# EAGLE board BMS Test Board rev1 (EAGLE 9.2.2), part 1 of 3
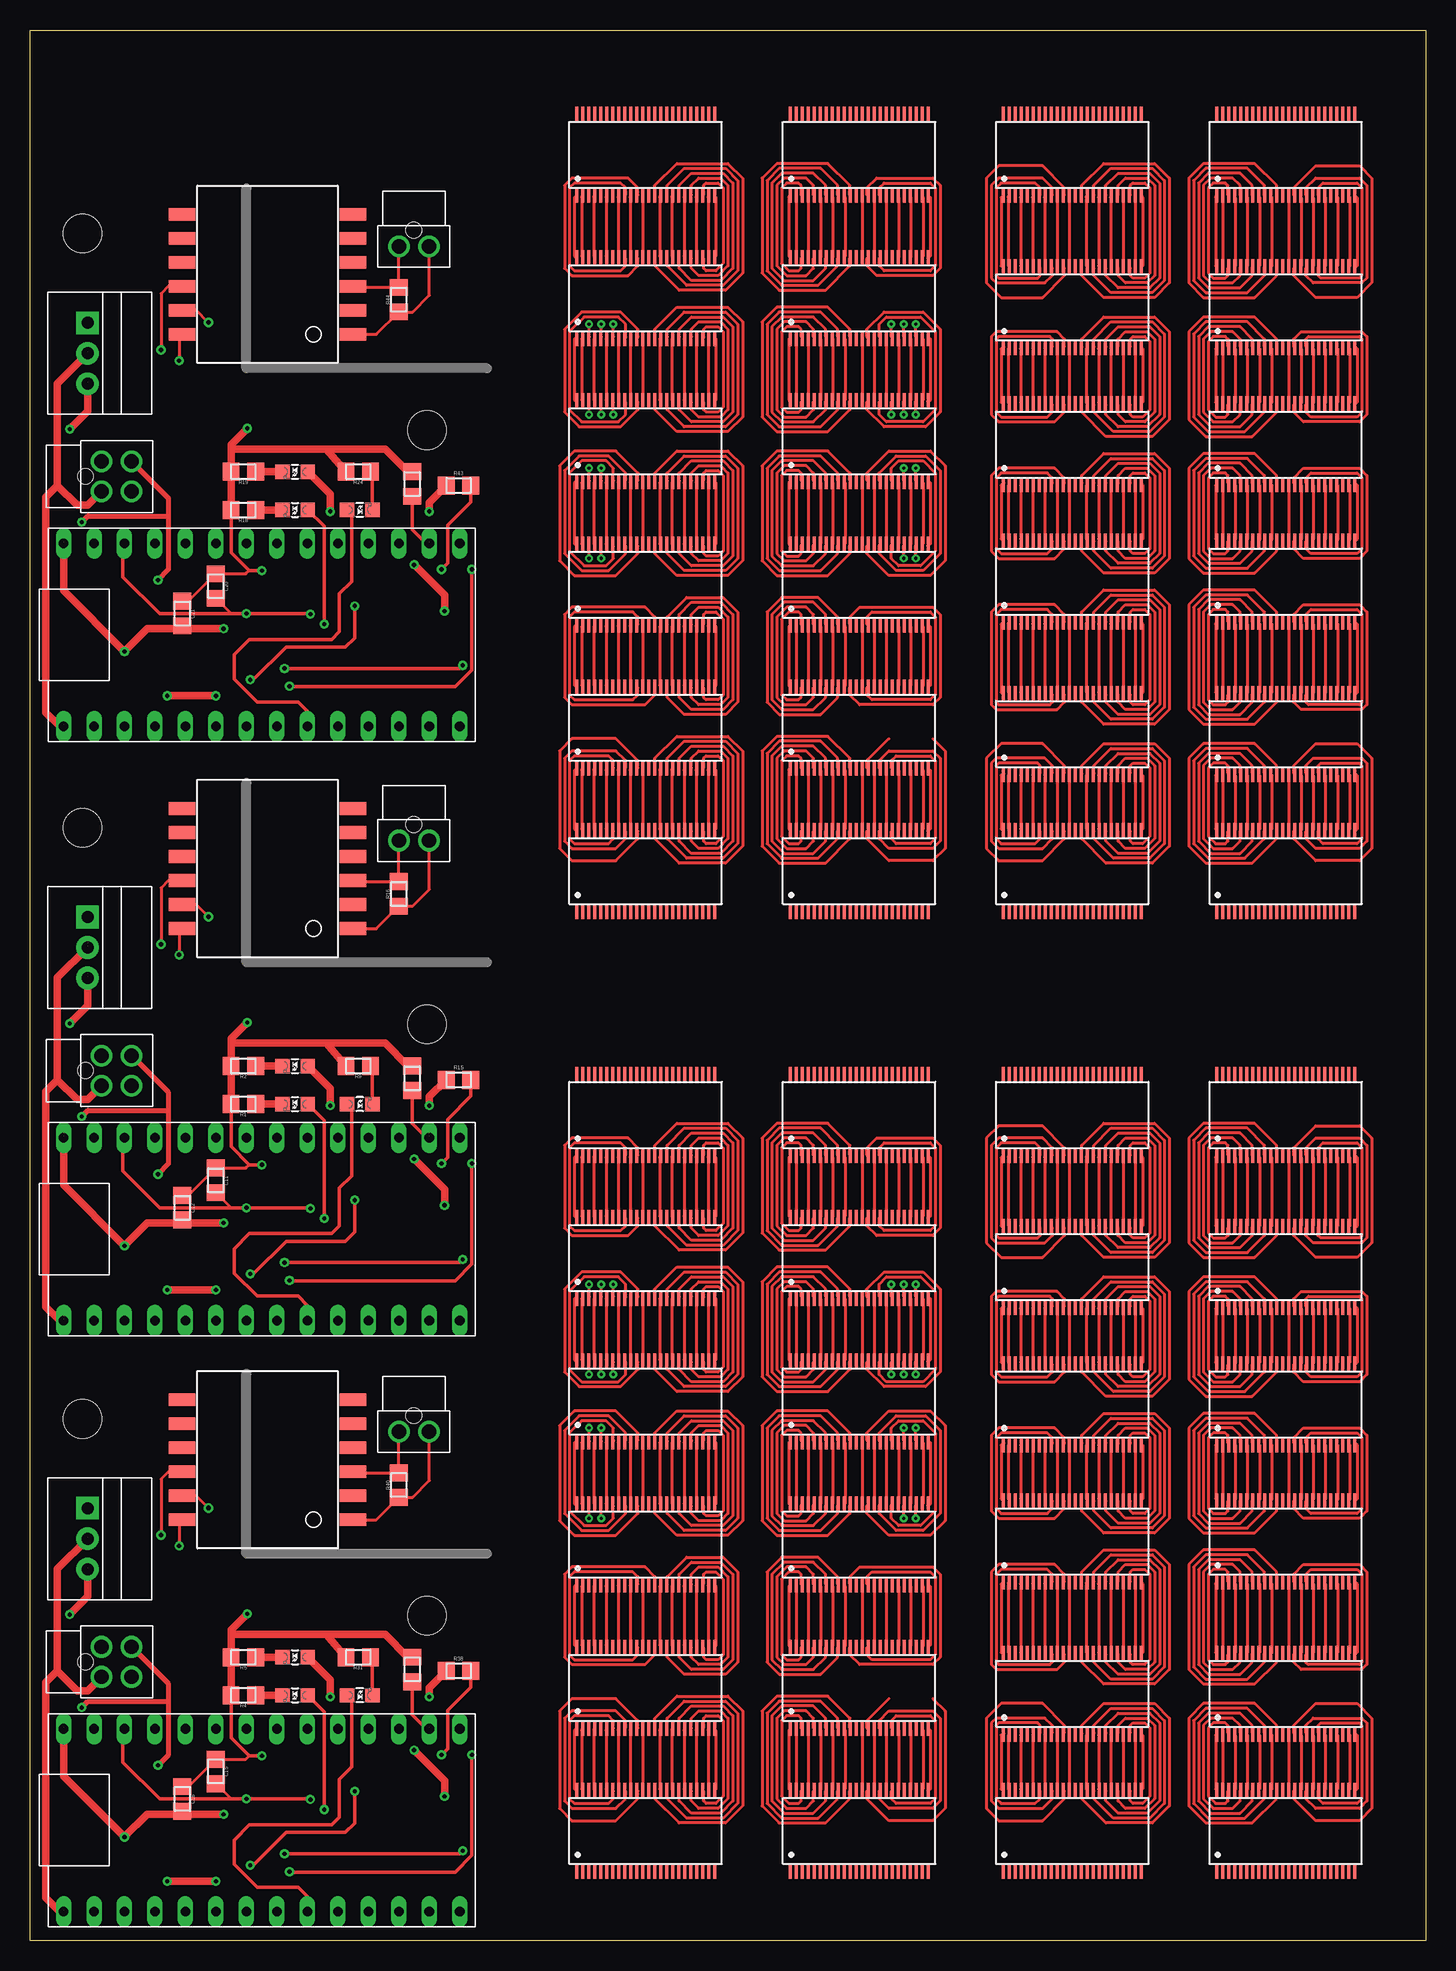
[diagram p0: board, top side]
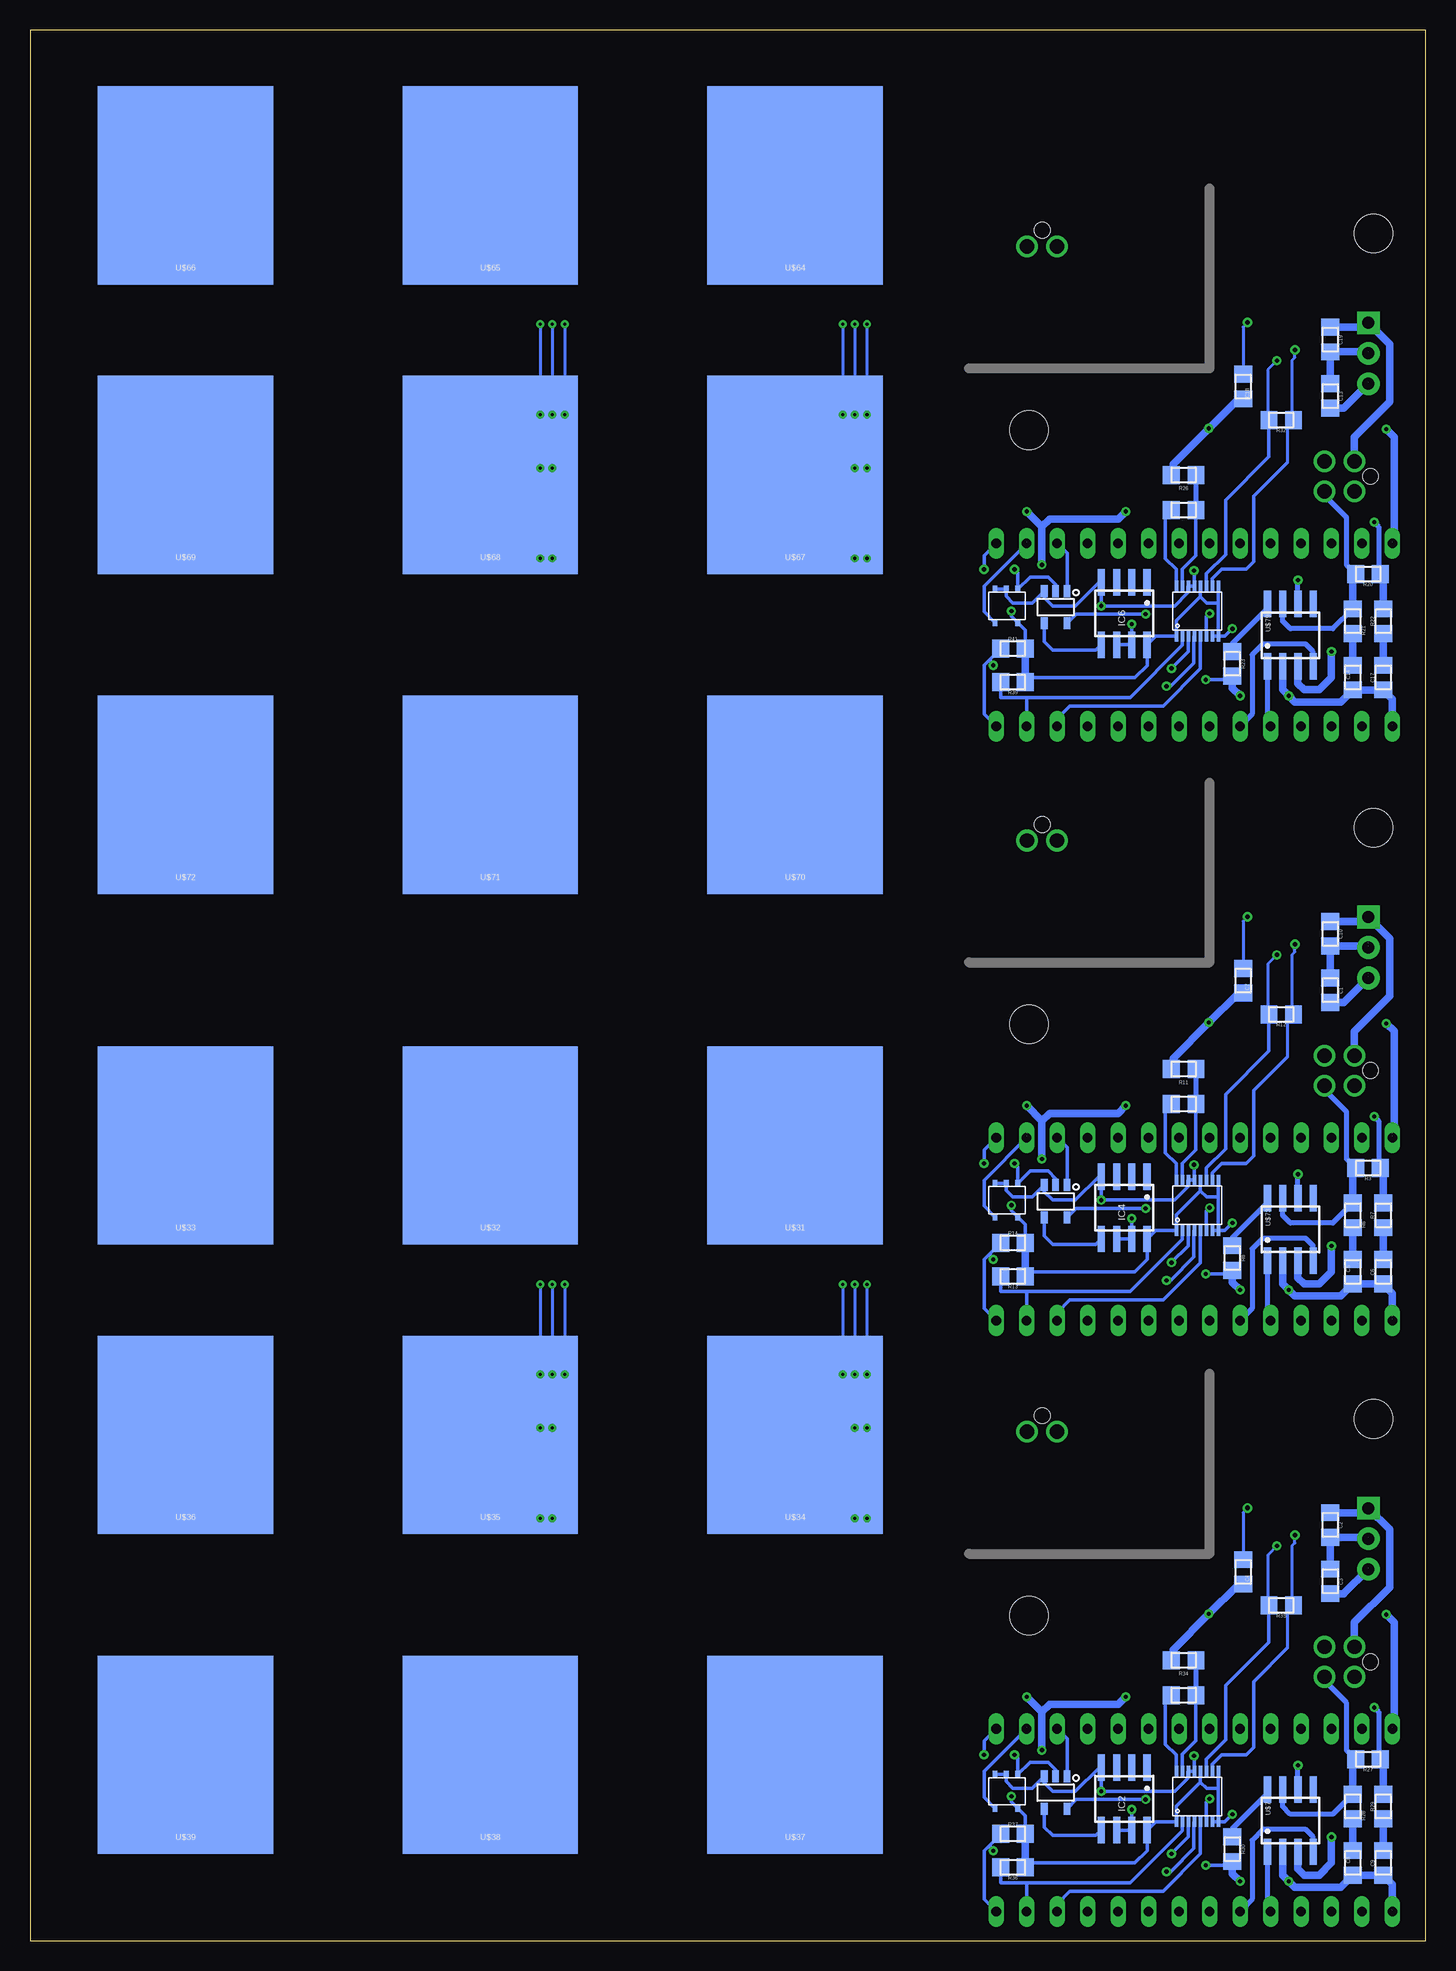
[diagram p1: board, bottom side, seen from below]

Size 116.33 x 159.26 mm. Coordinates in mm from the lower left corner, seen from the top.
Outline: 0,159.26 116.33,159.26 116.33,0 0,0 0,159.26
Copper layers (1*16): Top 0.035mm / dielectric 1.5mm / Bottom 0.035mm
Design rules "DRC Advanced Circuits": minimum track width 6mil, minimum drill 10mil, track to track 6mil, track to pad 6mil, pad to pad 6mil, via to via 6mil, smd to smd 6mil, copper to edge 40mil, drill to drill 6mil, minimum pad ring 10mil, minimum via ring 8mil, stop-mask expansion 4mil, vias tented up to drill 0mil, thermal gap 10mil
Net classes: 1 TS: clearance 8.5 mm to class 0; 2 ISO_SPI: clearance 8.5 mm to class 0, clearance 8.5 mm to class 1
Holes 3.2 mm at 33.07,27.1 4.37,43.48 33.07,76.38 4.37,92.76 33.07,125.91 4.37,142.29

## Footprints (pad centres in the part's own frame; a part is rotated, then mirrored left to right if it is on the bottom)
LED-805 = smd 1.2 x 1.2: A 0,-1.05; C 0,1.05
0805 = smd 1.4 x 1.5: 1 -1.025,0; 2 1.025,0
OKI-78SR = drill 1 pad 1.88 square: 1 -2.54,0 | drill 1 pad 1.88: 2 0,0; 3 2.54,0
SOIC-08 = smd 0.6 x 2.2: 1 -1.905,-2.6; 2 -0.635,-2.6; 3 0.635,-2.6; 4 1.905,-2.6; 5 1.905,2.6; 6 0.635,2.6; 7 -0.635,2.6; 8 -1.905,2.6
NANO-FIT_VERTICAL-2 = drill 1.2: P$1 -1.25,0; P$2 1.25,0 | hole 1.3: 0,-1.34
NANO-FIT_VERTICAL-4 = drill 1.2: P$1 -1.25,0; P$2 1.25,0; P$3 -1.25,2.5; P$4 1.25,2.5 | hole 1.3: 0,-1.34
LTC6804 = smd 0.25 x 1.25: 1 -5.75,-3.37; 2 -5.25,-3.37; 3 -4.75,-3.37; 4 -4.25,-3.37; 5 -3.75,-3.37; 6 -3.25,-3.37; 7 -2.75,-3.37; 8 -2.25,-3.37; 9 -1.75,-3.37; 10 -1.25,-3.37; 11 -0.75,-3.37; 12 -0.25,-3.37; 13 0.25,-3.37; 14 0.75,-3.37; 15 1.25,-3.37; 16 1.75,-3.37; 17 2.25,-3.37; 18 2.75,-3.37; 19 3.25,-3.37; 20 3.75,-3.37; 21 4.25,-3.37; 22 4.75,-3.37; 23 5.25,-3.37; 24 5.75,-3.37; 25 5.75,3.38; 26 5.25,3.38; 27 4.75,3.38; 28 4.25,3.38; 29 3.75,3.38; 30 3.25,3.38; 31 2.75,3.38; 32 2.25,3.38; 33 1.75,3.38; 34 1.25,3.38; 35 0.75,3.38; 36 0.25,3.38; 37 -0.25,3.38; 38 -0.75,3.38; 39 -1.25,3.38; 40 -1.75,3.38; 41 -2.25,3.38; 42 -2.75,3.38; 43 -3.25,3.38; 44 -3.75,3.38; 45 -4.25,3.38; 46 -4.75,3.38; 47 -5.25,3.38; 48 -5.75,3.38
HM2102NLT = smd 1.067 x 2.184: P$1 0,0; P$2 2,0; P$3 4,0; P$4 6,0; P$5 8,0; P$6 10,0; P$7 10,14.25; P$8 8,14.25; P$9 6,14.25; P$10 4,14.25; P$11 2,14.25; P$12 0,14.25
SOT-23-5 = smd 1 x 0.55: 1 -1.35,0.95; 2 -1.35,0; 3 -1.35,-0.95; 4 1.35,-0.95; 5 1.35,0.95
MSOP-16 = smd 0.305 x 0.889: 1 -0.1,-0.5; 2 0.4,-0.5; 3 0.9,-0.5; 4 1.4,-0.5; 5 1.9,-0.5; 6 2.4,-0.5; 7 2.9,-0.5; 8 3.4,-0.5; 9 3.4,3.7; 10 2.9,3.7; 11 2.4,3.7; 12 1.9,3.7; 13 1.4,3.7; 14 0.9,3.7; 15 0.4,3.7; 16 -0.1,3.7
TEENSY_3.2_SIMPLE = drill 0.8 long: 3.3V 16.51,29.21; A0 16.51,3.81; A1 16.51,6.35; A2 16.51,8.89; A3 16.51,11.43; A4 16.51,13.97; A5 16.51,16.51; A6 16.51,19.05; A7 16.51,21.59; A8 16.51,24.13; A9 16.51,26.67; AGND 16.51,31.75; D0(RX1) 1.27,31.75; D1(TX1) 1.27,29.21; D2 1.27,26.67; D3(CANTX) 1.27,24.13; D4(CANRX) 1.27,21.59; D5 1.27,19.05; D6 1.27,16.51; D7(RX3) 1.27,13.97; D8(TX3) 1.27,11.43; D9(RX2) 1.27,8.89; D10(TX2) 1.27,6.35; D11 1.27,3.81; D12 1.27,1.27; D13 16.51,1.27; GND 1.27,34.29; VIN 16.51,34.29
SOT23-5 = smd 0.61 x 0.406: EN -2.794,0; GND -2.794,0.94; VCC 0,1.905; WDI 0,0; WDO -2.794,1.905
KEYSTONE5222 = smd 14.605 x 16.51: P$1 0,0

## Placement (x,y rotation side)
BMS-OK  GREEN  [LED-805]  22.1,20.45 90 top
BMS-OK1  GREEN  [LED-805]  22.1,69.72 90 top
BMS-OK2  GREEN  [LED-805]  22.1,119.25 90 top
C1  10uF  [0805]  7.98,79.22 90 bottom
C2  10uF  [0805]  7.98,34.65 270 bottom
C3  10uF  [0805]  7.98,29.95 90 bottom
C4  27pF  [0805]  15.24,30.73 270 bottom
C5  560pF  [0805]  6.1,55.75 90 bottom
C6  560pF  [0805]  3.56,55.75 90 bottom
C7  27pF  [0805]  15.24,80.01 270 bottom
C8  560pF  [0805]  6.1,6.48 90 bottom
C9  560pF  [0805]  3.56,6.48 90 bottom
C10  10uF  [0805]  7.98,83.92 270 bottom
C11  0.1uF  [0805]  15.49,63.37 270 top
C12  0.1uF  [0805]  12.7,61.09 270 top
C13  10uF  [0805]  7.98,128.75 90 bottom
C14  560pF  [0805]  6.1,105.28 90 bottom
C15  0.1uF  [0805]  15.49,14.1 270 top
C16  0.1uF  [0805]  12.7,11.81 270 top
C17  560pF  [0805]  3.56,105.28 90 bottom
C18  27pF  [0805]  15.24,129.54 270 bottom
C19  10uF  [0805]  7.98,133.45 270 bottom
C20  0.1uF  [0805]  15.49,112.9 270 top
C21  0.1uF  [0805]  12.7,110.62 270 top
IC1  OKI-78SR-5  [OKI-78SR]  4.8,33.5 270 top
IC2  NE5532SOIC  [SOIC-08]  25.15,11.81 180 bottom
IC3  OKI-78SR-5  [OKI-78SR]  4.8,82.78 270 top
IC4  NE5532SOIC  [SOIC-08]  25.15,61.09 180 bottom
IC5  OKI-78SR-5  [OKI-78SR]  4.8,132.31 270 top
IC6  NE5532SOIC  [SOIC-08]  25.15,110.62 180 bottom
ISO_SPI  ISO_SPI  [NANO-FIT_VERTICAL-2]  31.98,42.42 180 top
ISO_SPI1  ISO_SPI  [NANO-FIT_VERTICAL-2]  31.98,91.69 180 top
ISO_SPI2  ISO_SPI  [NANO-FIT_VERTICAL-2]  31.98,141.22 180 top
ON-LED  PURPLE  [LED-805]  22.1,23.62 90 top
ON-LED1  PURPLE  [LED-805]  22.1,72.9 90 top
ON-LED2  PURPLE  [LED-805]  22.1,122.43 90 top
POWER  POWER  [NANO-FIT_VERTICAL-4]  5.97,23.24 270 top
POWER1  POWER  [NANO-FIT_VERTICAL-4]  5.97,72.52 270 top
POWER2  POWER  [NANO-FIT_VERTICAL-4]  5.97,122.05 270 top
R1  820  [0805]  17.78,69.72 180 top
R2  270  [0805]  17.78,72.9 180 top
R3  120  [0805]  4.83,64.39 180 bottom
R4  820  [0805]  17.78,20.45 180 top
R5  270  [0805]  17.78,23.62 180 top
R6  100  [0805]  6.1,60.45 90 bottom
R7  100  [0805]  3.56,60.45 90 bottom
R8  1k  [0805]  16.13,56.9 90 bottom
R9  430  [0805]  27.36,72.9 180 top
R10  1k  [0805]  20.19,69.72 0 bottom
R11  1k  [0805]  20.19,72.64 180 bottom
R12  120  [0805]  12.06,77.22 180 bottom
R13  2k  [0805]  34.42,55.37 180 bottom
R14  2k  [0805]  34.42,58.17 180 bottom
R15  430  [0805]  35.71,71.75 0 top
R16  100  [0805]  30.73,87.25 90 top
R17  10k  [0805]  31.85,71.88 90 top
R18  820  [0805]  17.78,119.25 180 top
R19  270  [0805]  17.78,122.43 180 top
R20  120  [0805]  4.83,113.92 180 bottom
R21  100  [0805]  6.1,109.98 90 bottom
R22  100  [0805]  3.56,109.98 90 bottom
R23  1k  [0805]  16.13,106.43 90 bottom
R24  430  [0805]  27.36,122.43 180 top
R25  1k  [0805]  20.19,119.25 0 bottom
R26  1k  [0805]  20.19,122.17 180 bottom
R27  120  [0805]  4.83,15.11 180 bottom
R28  100  [0805]  6.1,11.18 90 bottom
R29  100  [0805]  3.56,11.18 90 bottom
R30  1k  [0805]  16.13,7.62 90 bottom
R31  430  [0805]  27.36,23.62 180 top
R32  120  [0805]  12.06,126.75 180 bottom
R33  1k  [0805]  20.19,20.45 0 bottom
R34  1k  [0805]  20.19,23.37 180 bottom
R35  120  [0805]  12.06,27.94 180 bottom
R36  2k  [0805]  34.42,6.1 180 bottom
R37  2k  [0805]  34.42,8.89 180 bottom
R38  430  [0805]  35.71,22.48 0 top
R39  2k  [0805]  34.42,104.9 180 bottom
R40  100  [0805]  30.73,37.97 90 top
R41  2k  [0805]  34.42,107.7 180 bottom
R42  10k  [0805]  31.85,22.61 90 top
R43  430  [0805]  35.71,121.28 0 top
R44  100  [0805]  30.73,136.78 90 top
R45  10k  [0805]  31.85,121.41 90 top
TEENSY  BLUE  [LED-805]  27.48,20.45 270 top
TEENSY1  BLUE  [LED-805]  27.48,69.72 270 top
TEENSY2  BLUE  [LED-805]  27.48,119.25 270 top
U$1  LTC6804-2  [LTC6804]  51.31,9.14 0 top
U$2  HM2102NLT  [HM2102NLT]  26.92,35.09 90 top
U$3  SN74LVC1G08  [SOT-23-5]  30.86,12.34 270 bottom
U$4  LTC6804-2  [LTC6804]  51.31,21.08 0 top
U$5  LTC6804-2  [LTC6804]  51.31,33.02 0 top
U$6  LTC6804-2  [LTC6804]  51.31,44.96 0 top
U$7  MCP2551  [SOIC-08]  11.3,10.01 0 bottom
U$8  LTC6820  [MSOP-16]  20.7,10.41 0 bottom
U$9  TEENSY_3.2_SIMPLE  [TEENSY_3.2_SIMPLE]  37.08,1.14 90 top
U$10  STWD100  [SOT23-5]  35.92,11.05 270 bottom
U$11  LTC6804-2  [LTC6804]  51.31,56.9 0 top
U$12  LTC6804-2  [LTC6804]  51.31,68.83 0 top
U$13  LTC6804-2  [LTC6804]  69.09,9.14 0 top
U$14  LTC6804-2  [LTC6804]  69.09,21.08 0 top
U$15  LTC6804-2  [LTC6804]  69.09,33.02 0 top
U$16  LTC6804-2  [LTC6804]  69.09,44.96 0 top
U$17  LTC6804-2  [LTC6804]  69.09,56.9 0 top
U$18  LTC6804-2  [LTC6804]  69.09,68.83 0 top
U$19  LTC6804-2  [LTC6804]  86.87,9.14 0 top
U$20  LTC6804-2  [LTC6804]  86.87,20.57 0 top
U$21  LTC6804-2  [LTC6804]  86.87,33.27 0 top
U$22  LTC6804-2  [LTC6804]  86.87,44.7 0 top
U$23  LTC6804-2  [LTC6804]  86.87,56.13 0 top
U$24  LTC6804-2  [LTC6804]  86.87,68.83 0 top
U$25  LTC6804-2  [LTC6804]  104.65,9.14 0 top
U$26  LTC6804-2  [LTC6804]  104.65,20.57 0 top
U$27  LTC6804-2  [LTC6804]  104.65,33.27 0 top
U$28  LTC6804-2  [LTC6804]  104.65,44.7 0 top
U$29  LTC6804-2  [LTC6804]  104.65,56.13 0 top
U$30  LTC6804-2  [LTC6804]  104.65,68.83 0 top
U$31  BATTERY_SPRING_KEYSTONE5222  [KEYSTONE5222]  52.58,66.29 0 bottom
U$32  BATTERY_SPRING_KEYSTONE5222  [KEYSTONE5222]  77.98,66.29 0 bottom
U$33  BATTERY_SPRING_KEYSTONE5222  [KEYSTONE5222]  103.38,66.29 0 bottom
U$34  BATTERY_SPRING_KEYSTONE5222  [KEYSTONE5222]  52.58,42.16 0 bottom
U$35  BATTERY_SPRING_KEYSTONE5222  [KEYSTONE5222]  77.98,42.16 0 bottom
U$36  BATTERY_SPRING_KEYSTONE5222  [KEYSTONE5222]  103.38,42.16 0 bottom
U$37  BATTERY_SPRING_KEYSTONE5222  [KEYSTONE5222]  52.58,15.49 0 bottom
U$38  BATTERY_SPRING_KEYSTONE5222  [KEYSTONE5222]  77.98,15.49 0 bottom
U$39  BATTERY_SPRING_KEYSTONE5222  [KEYSTONE5222]  103.38,15.49 0 bottom
U$40  LTC6804-2  [LTC6804]  51.31,89.15 0 top
U$41  LTC6804-2  [LTC6804]  51.31,101.09 0 top
U$42  LTC6804-2  [LTC6804]  51.31,113.03 0 top
U$43  LTC6804-2  [LTC6804]  51.31,124.97 0 top
U$44  LTC6804-2  [LTC6804]  51.31,136.91 0 top
U$45  LTC6804-2  [LTC6804]  51.31,148.84 0 top
U$46  LTC6804-2  [LTC6804]  69.09,89.15 0 top
U$47  LTC6804-2  [LTC6804]  69.09,101.09 0 top
U$48  LTC6804-2  [LTC6804]  69.09,113.03 0 top
U$49  LTC6804-2  [LTC6804]  69.09,124.97 0 top
U$50  LTC6804-2  [LTC6804]  69.09,136.91 0 top
U$51  LTC6804-2  [LTC6804]  69.09,148.84 0 top
U$52  LTC6804-2  [LTC6804]  86.87,89.15 0 top
U$53  LTC6804-2  [LTC6804]  86.87,100.58 0 top
U$54  LTC6804-2  [LTC6804]  86.87,113.28 0 top
U$55  LTC6804-2  [LTC6804]  86.87,124.71 0 top
U$56  LTC6804-2  [LTC6804]  86.87,136.14 0 top
U$57  LTC6804-2  [LTC6804]  86.87,148.84 0 top
U$58  LTC6804-2  [LTC6804]  104.65,89.15 0 top
U$59  LTC6804-2  [LTC6804]  104.65,100.58 0 top
U$60  LTC6804-2  [LTC6804]  104.65,113.28 0 top
U$61  LTC6804-2  [LTC6804]  104.65,124.71 0 top
U$62  LTC6804-2  [LTC6804]  104.65,136.14 0 top
U$63  LTC6804-2  [LTC6804]  104.65,148.84 0 top
U$64  BATTERY_SPRING_KEYSTONE5222  [KEYSTONE5222]  52.58,146.3 0 bottom
U$65  BATTERY_SPRING_KEYSTONE5222  [KEYSTONE5222]  77.98,146.3 0 bottom
U$66  BATTERY_SPRING_KEYSTONE5222  [KEYSTONE5222]  103.38,146.3 0 bottom
U$67  BATTERY_SPRING_KEYSTONE5222  [KEYSTONE5222]  52.58,122.17 0 bottom
U$68  BATTERY_SPRING_KEYSTONE5222  [KEYSTONE5222]  77.98,122.17 0 bottom
U$69  BATTERY_SPRING_KEYSTONE5222  [KEYSTONE5222]  103.38,122.17 0 bottom
U$70  BATTERY_SPRING_KEYSTONE5222  [KEYSTONE5222]  52.58,95.5 0 bottom
U$71  BATTERY_SPRING_KEYSTONE5222  [KEYSTONE5222]  77.98,95.5 0 bottom
U$72  BATTERY_SPRING_KEYSTONE5222  [KEYSTONE5222]  103.38,95.5 0 bottom
U$73  MCP2551  [SOIC-08]  11.3,59.28 0 bottom
U$74  LTC6820  [MSOP-16]  20.7,59.69 0 bottom
U$75  TEENSY_3.2_SIMPLE  [TEENSY_3.2_SIMPLE]  37.08,50.42 90 top
U$76  STWD100  [SOT23-5]  35.92,60.33 270 bottom
U$77  HM2102NLT  [HM2102NLT]  26.92,84.36 90 top
U$78  SN74LVC1G08  [SOT-23-5]  30.86,61.62 270 bottom
U$79  MCP2551  [SOIC-08]  11.3,108.81 0 bottom
U$80  LTC6820  [MSOP-16]  20.7,109.22 0 bottom
U$81  TEENSY_3.2_SIMPLE  [TEENSY_3.2_SIMPLE]  37.08,99.95 90 top
U$82  STWD100  [SOT23-5]  35.92,109.86 270 bottom
U$83  HM2102NLT  [HM2102NLT]  26.92,133.89 90 top
U$84  SN74LVC1G08  [SOT-23-5]  30.86,111.15 270 bottom

## Library data of the parts
BMS-OK BMS-OK1 BMS-OK2 C1-C21 IC1-IC6 ISO_SPI ISO_SPI1 ISO_SPI2 ON-LED ON-LED1 ON-LED2 POWER POWER1 POWER2 R1-R45 TEENSY TEENSY1 TEENSY2 U$1-U$84 = HyTechDevices

## Nets
+3V1: C11.2 U$74.6 U$75.3.3V U$78.5
+3V2: C20.2 U$80.6 U$81.3.3V U$84.5
+3V3: C15.2 U$3.5 U$8.6 U$9.3.3V
+5V: C3.1 C16.2 IC1.3 IC2.8 ON-LED.A R36.1 R37.1 R38.1 U$7.3 U$8.1 U$8.7 U$8.8 U$8.9 U$8.12 U$9.VIN U$10.VCC
+5V1: C1.1 C12.2 IC3.3 IC4.8 ON-LED1.A R13.1 R14.1 R15.1 U$73.3 U$74.1 U$74.7 U$74.8 U$74.9 U$74.12 U$75.VIN U$76.VCC
+5V2: C13.1 C21.2 IC5.3 IC6.8 ON-LED2.A R39.1 R41.1 R43.1 U$79.3 U$80.1 U$80.7 U$80.8 U$80.9 U$80.12 U$81.VIN U$82.VCC
+12V: C2.1 IC1.1 POWER.P$1
+12V1: C10.1 IC3.1 POWER1.P$1
+12V2: C19.1 IC5.1 POWER2.P$1
BMS_OK: IC2.5 U$3.4
BMS_OK1: IC4.5 U$78.4
BMS_OK2: IC6.5 U$84.4
CANH: POWER.P$4 R27.2 R28.2 U$7.7
CANH1: POWER1.P$4 R3.2 R6.2 U$73.7
CANH2: POWER2.P$4 R20.2 R21.2 U$79.7
CANL: POWER.P$3 R27.1 R29.2 U$7.6
CANL1: POWER1.P$3 R3.1 R7.2 U$73.6
CANL2: POWER2.P$3 R20.1 R22.2 U$79.6
CS_LTC1: U$74.5 U$75.D10(TX2)
CS_LTC2: U$80.5 U$81.D10(TX2)
CS_LTC6820: U$8.5 U$9.D10(TX2)
CS_MCP3208_3.3V: U$9.D9(RX2)
CS_MCP3208_3.3V1: U$75.D9(RX2)
CS_MCP3208_3.3V2: U$81.D9(RX2)
GND: C2.2 C3.2 C4.2 C8.1 C9.1 C15.1 C16.1 IC1.2 IC2.4 POWER.P$2 R4.2 R5.2 R30.1 R31.2 R34.2 R42.2 U$3.3 U$7.2 U$8.13 U$8.14 U$9.GND U$10.EN U$10.GND
GND1: C1.2 C5.1 C6.1 C7.2 C10.2 C11.1 C12.1 IC3.2 IC4.4 POWER1.P$2 R1.2 R2.2 R8.1 R9.2 R11.2 R17.2 U$73.2 U$74.13 U$74.14 U$75.GND U$76.EN U$76.GND U$78.3
GND2: C13.2 C14.1 C17.1 C18.2 C19.2 C20.1 C21.1 IC5.2 IC6.4 POWER2.P$2 R18.2 R19.2 R23.1 R24.2 R26.2 R45.2 U$79.2 U$80.13 U$80.14 U$81.GND U$82.EN U$82.GND U$84.3
IM: R35.1 U$2.P$10 U$8.10
IM1: R12.1 U$74.10 U$77.P$10
IM2: R32.1 U$80.10 U$83.P$10
IP: R35.2 U$2.P$12 U$8.11
IP1: R12.2 U$74.11 U$77.P$12
IP2: R32.2 U$80.11 U$83.P$12
ISOSPI-M [ISO_SPI]: ISO_SPI.P$2 R40.2 U$2.P$3
ISOSPI-M1 [ISO_SPI]: ISO_SPI1.P$2 R16.2 U$77.P$3
ISOSPI-M2 [ISO_SPI]: ISO_SPI2.P$2 R44.2 U$83.P$3
ISOSPI-P [ISO_SPI]: ISO_SPI.P$1 R40.1 U$2.P$1
ISOSPI-P1 [ISO_SPI]: ISO_SPI1.P$1 R16.1 U$77.P$1
ISOSPI-P2 [ISO_SPI]: ISO_SPI2.P$1 R44.1 U$83.P$1
MISO: R37.2 U$8.3 U$9.D12
MISO1: R14.2 U$74.3 U$75.D12
MISO2: R41.2 U$80.3 U$81.D12
MOSI_TEENSY: R36.2 U$8.2 U$9.D11
MOSI_TEENSY1: R13.2 U$74.2 U$75.D11
MOSI_TEENSY2: R39.2 U$80.2 U$81.D11
N$1: U$1.48 U$4.1
N$2: U$1.47 U$4.2
N$3: ON-LED.C R5.1
N$4: U$1.46 U$4.3
N$5: U$1.45 U$4.4
N$6: U$1.44 U$4.5
N$7: U$1.43 U$4.6
N$8: U$1.42 U$4.7
N$9: U$1.41 U$4.8
N$10: U$1.40 U$4.9
N$11: U$1.39 U$4.10
N$12: U$1.38 U$4.11
N$13: U$1.37 U$4.12
N$14: U$1.36 U$4.13
N$15: U$1.35 U$4.14
N$16: U$1.34 U$4.15
N$17: U$1.33 U$4.16
N$18: U$1.32 U$4.17
N$19: U$1.31 U$4.18
N$20: U$1.30 U$4.19
N$21: U$1.29 U$4.20
N$22: U$1.28 U$4.21
N$23: U$1.27 U$4.22
N$24: U$1.26 U$4.23
N$25: U$7.1 U$9.D3(CANTX)
N$26: R30.2 U$7.8
N$27: C8.2 R28.1
N$28: C9.2 R29.1
N$29: R31.1 TEENSY.C
N$30: U$1.25 U$4.24
N$31: R33.1 U$8.16
N$32: R33.2 R34.1 U$8.15
N$33: U$4.48 U$5.1
N$34: U$4.47 U$5.2
N$35: C4.1 U$2.P$11
N$36: U$7.4 U$9.D4(CANRX)
N$37: TEENSY.A U$9.D7(RX3)
N$38: R38.2 U$3.2 U$10.WDO
N$39: U$4.46 U$5.3
N$40: U$3.1 U$9.A1
N$41: U$4.45 U$5.4
N$42: U$4.44 U$5.5
N$43: BMS-OK.A IC2.6 IC2.7
N$44: BMS-OK.C R4.1
N$45: U$4.43 U$5.6
N$46: U$4.42 U$5.7
N$47: U$4.41 U$5.8
N$48: U$4.40 U$5.9
N$49: U$4.39 U$5.10
N$51: U$4.38 U$5.11
N$52: U$4.37 U$5.12
N$53: U$4.36 U$5.13
N$54: U$4.35 U$5.14
N$55: U$4.34 U$5.15
N$56: U$4.33 U$5.16
N$57: U$4.32 U$5.17
N$58: U$4.31 U$5.18
N$59: U$4.30 U$5.19
N$60: U$4.29 U$5.20
N$61: U$4.28 U$5.21
N$62: U$4.27 U$5.22
N$63: U$4.26 U$5.23
N$64: U$4.25 U$5.24
N$65: U$5.48 U$6.1
N$66: U$5.47 U$6.2
N$67: U$5.46 U$6.3
N$68: U$5.45 U$6.4
N$69: U$5.44 U$6.5
N$70: U$5.43 U$6.6
N$71: U$5.42 U$6.7
N$72: U$5.41 U$6.8
N$73: U$5.40 U$6.9
N$74: U$5.39 U$6.10
N$75: U$5.38 U$6.11
N$76: U$5.37 U$6.12
N$77: U$5.36 U$6.13
N$78: U$5.35 U$6.14
N$79: U$5.34 U$6.15
N$80: U$5.33 U$6.16
N$81: U$5.32 U$6.17
N$82: U$5.31 U$6.18
N$83: U$5.30 U$6.19
N$84: U$5.29 U$6.20
N$85: U$5.28 U$6.21
N$86: U$5.27 U$6.22
N$87: U$5.26 U$6.23
N$88: U$5.25 U$6.24
N$89: U$6.48 U$11.1
N$90: U$6.47 U$11.2
N$91: U$6.46 U$11.3
N$92: U$6.45 U$11.4
N$93: U$6.44 U$11.5
N$94: U$6.43 U$11.6
N$95: U$6.42 U$11.7
N$96: U$6.41 U$11.8
N$97: U$6.40 U$11.9
N$98: U$6.39 U$11.10
N$99: U$6.38 U$11.11
N$100: U$6.37 U$11.12
N$101: U$6.36 U$11.13
N$102: U$6.35 U$11.14
N$103: U$6.34 U$11.15
N$104: U$6.33 U$11.16
N$105: U$6.32 U$11.17
N$106: U$6.31 U$11.18
N$107: U$6.30 U$11.19
N$108: U$6.29 U$11.20
N$109: U$6.28 U$11.21
N$110: U$6.27 U$11.22
N$111: U$6.26 U$11.23
N$112: U$6.25 U$11.24
N$113: U$11.48 U$12.1
N$114: U$11.47 U$12.2
N$115: U$11.46 U$12.3
N$116: U$11.45 U$12.4
N$117: U$11.44 U$12.5
N$118: U$11.43 U$12.6
N$119: U$11.42 U$12.7
N$120: U$11.41 U$12.8
N$121: U$11.40 U$12.9
N$122: U$11.39 U$12.10
N$123: U$11.38 U$12.11
N$124: U$11.37 U$12.12
N$125: U$11.36 U$12.13
N$126: U$11.35 U$12.14
N$127: U$11.34 U$12.15
N$128: U$11.33 U$12.16
N$129: U$11.32 U$12.17
N$130: U$11.31 U$12.18
N$131: U$11.30 U$12.19
N$132: U$11.29 U$12.20
N$133: U$11.28 U$12.21
N$134: U$11.27 U$12.22
N$135: U$11.26 U$12.23
N$136: U$11.25 U$12.24
N$137: U$13.25 U$14.24
N$138: U$13.26 U$14.23
N$139: U$13.27 U$14.22
N$140: U$13.28 U$14.21
N$141: U$13.29 U$14.20
N$142: U$13.30 U$14.19
N$143: U$13.31 U$14.18
N$144: U$13.32 U$14.17
N$145: U$13.33 U$14.16
N$146: U$13.34 U$14.15
N$147: U$13.35 U$14.14
N$148: U$13.36 U$14.13
N$149: U$13.37 U$14.12
N$150: U$13.38 U$14.11
N$151: U$13.39 U$14.10
N$152: U$13.40 U$14.9
N$153: U$13.41 U$14.8
N$154: U$13.42 U$14.7
N$155: U$13.43 U$14.6
N$156: U$13.44 U$14.5
N$157: U$13.45 U$14.4
N$158: U$13.46 U$14.3
N$159: U$13.47 U$14.2
N$160: U$13.48 U$14.1
N$161: U$14.25 U$15.24
N$162: U$14.26 U$15.23
N$163: U$14.27 U$15.22
N$164: U$14.28 U$15.21
N$165: U$14.29 U$15.20
N$166: U$14.30 U$15.19
N$167: U$14.31 U$15.18
N$168: U$14.32 U$15.17
N$169: U$14.33 U$15.16
N$170: U$14.34 U$15.15
N$171: U$14.35 U$15.14
N$172: U$14.36 U$15.13
N$173: U$14.37 U$15.12
N$174: U$14.38 U$15.11
N$175: U$14.39 U$15.10
N$176: U$14.40 U$15.9
N$177: U$14.41 U$15.8
N$178: U$14.42 U$15.7
N$179: U$14.43 U$15.6
N$180: U$14.44 U$15.5
N$181: U$14.45 U$15.4
N$182: U$14.46 U$15.3
N$183: U$14.47 U$15.2
N$184: U$14.48 U$15.1
N$185: U$15.25 U$16.24
N$186: U$15.26 U$16.23
N$187: U$15.27 U$16.22
N$188: U$15.28 U$16.21
N$189: U$15.29 U$16.20
N$190: U$15.30 U$16.19
N$191: U$15.31 U$16.18
N$192: U$15.32 U$16.17
N$193: U$15.33 U$16.16
N$194: U$15.34 U$16.15
N$195: U$15.35 U$16.14
N$196: U$15.36 U$16.13
N$197: U$15.37 U$16.12
N$198: U$15.38 U$16.11
N$199: U$15.39 U$16.10
N$200: U$15.40 U$16.9
N$201: U$15.41 U$16.8
N$202: U$15.42 U$16.7
N$203: U$15.43 U$16.6
N$204: U$15.44 U$16.5
N$205: U$15.45 U$16.4
N$206: U$15.46 U$16.3
N$207: U$15.47 U$16.2
N$208: U$15.48 U$16.1
N$209: U$16.25 U$17.24
N$210: U$16.26 U$17.23
N$211: U$16.27 U$17.22
N$212: U$16.28 U$17.21
N$213: U$16.29 U$17.20
N$214: U$16.30 U$17.19
N$215: U$16.31 U$17.18
N$216: U$16.32 U$17.17
N$217: U$16.33 U$17.16
N$218: U$16.34 U$17.15
N$219: U$16.35 U$17.14
N$220: U$16.36 U$17.13
N$221: U$16.37 U$17.12
N$222: U$16.38 U$17.11
N$223: U$16.39 U$17.10
N$224: U$16.40 U$17.9
N$225: U$16.41 U$17.8
N$226: U$16.42 U$17.7
N$227: U$16.43 U$17.6
N$228: U$16.44 U$17.5
N$229: U$16.45 U$17.4
N$230: U$16.46 U$17.3
N$231: U$16.47 U$17.2
N$232: U$16.48 U$17.1
N$233: U$17.25 U$18.24
N$234: U$17.26 U$18.23
N$235: U$17.27 U$18.22
N$236: U$17.28 U$18.21
N$237: U$17.29 U$18.20
N$238: U$17.30 U$18.19
N$239: U$17.31 U$18.18
N$240: U$17.32 U$18.17
N$241: U$17.33 U$18.16
N$242: U$17.34 U$18.15
N$243: U$17.35 U$18.14
N$244: U$17.36 U$18.13
N$245: U$17.37 U$18.12
N$246: U$17.38 U$18.11
N$247: U$17.39 U$18.10
N$248: U$17.40 U$18.9
N$249: U$17.41 U$18.8
N$250: U$17.42 U$18.7
N$251: U$17.43 U$18.6
N$252: U$17.44 U$18.5
N$253: U$17.45 U$18.4
N$254: U$17.46 U$18.3
N$255: U$17.47 U$18.2
N$256: U$17.48 U$18.1
N$257: U$19.48 U$20.1
N$258: U$19.47 U$20.2
N$259: U$19.46 U$20.3
N$260: U$19.45 U$20.4
N$261: U$19.44 U$20.5
N$262: U$19.43 U$20.6
N$263: U$19.42 U$20.7
N$264: U$19.41 U$20.8
N$265: U$19.40 U$20.9
N$266: U$19.39 U$20.10
N$267: U$19.38 U$20.11
N$268: U$19.37 U$20.12
N$269: U$19.36 U$20.13
N$270: U$19.35 U$20.14
N$271: U$19.34 U$20.15
N$272: U$19.33 U$20.16
N$273: U$19.32 U$20.17
N$274: U$19.31 U$20.18
N$275: U$19.30 U$20.19
N$276: U$19.29 U$20.20
N$277: U$19.28 U$20.21
N$278: U$19.27 U$20.22
N$279: U$19.26 U$20.23
N$280: U$19.25 U$20.24
N$281: U$20.48 U$21.1
N$282: U$20.47 U$21.2
N$283: U$20.46 U$21.3
N$284: U$20.45 U$21.4
N$285: U$20.44 U$21.5
N$286: U$20.43 U$21.6
N$287: U$20.42 U$21.7
N$288: U$20.41 U$21.8
N$289: U$20.40 U$21.9
N$290: U$20.39 U$21.10
N$291: U$20.38 U$21.11
N$292: U$20.37 U$21.12
N$293: U$20.36 U$21.13
N$294: U$20.35 U$21.14
N$295: U$20.34 U$21.15
N$296: U$20.33 U$21.16
N$297: U$20.32 U$21.17
N$298: U$20.31 U$21.18
N$299: U$20.30 U$21.19
N$300: U$20.29 U$21.20
N$301: U$20.28 U$21.21
N$302: U$20.27 U$21.22
N$303: U$20.26 U$21.23
N$304: U$20.25 U$21.24
N$305: U$21.48 U$22.1
N$306: U$21.47 U$22.2
N$307: U$21.46 U$22.3
N$308: U$21.45 U$22.4
N$309: U$21.44 U$22.5
N$310: U$21.43 U$22.6
N$311: U$21.42 U$22.7
N$312: U$21.41 U$22.8
N$313: U$21.40 U$22.9
N$314: U$21.39 U$22.10
N$315: U$21.38 U$22.11
N$316: U$21.37 U$22.12
N$317: U$21.36 U$22.13
N$318: U$21.35 U$22.14
N$319: U$21.34 U$22.15
N$320: U$21.33 U$22.16
N$321: U$21.32 U$22.17
N$322: U$21.31 U$22.18
N$323: U$21.30 U$22.19
N$324: U$21.29 U$22.20
N$325: U$21.28 U$22.21
N$326: U$21.27 U$22.22
N$327: U$21.26 U$22.23
N$328: U$21.25 U$22.24
N$329: U$22.48 U$23.1
N$330: U$22.47 U$23.2
N$331: U$22.46 U$23.3
N$332: U$22.45 U$23.4
N$333: U$22.44 U$23.5
N$334: U$22.43 U$23.6
N$335: U$22.42 U$23.7
N$336: U$22.41 U$23.8
N$337: U$22.40 U$23.9
N$338: U$22.39 U$23.10
N$339: U$22.38 U$23.11
N$340: U$22.37 U$23.12
N$341: U$22.36 U$23.13
N$342: U$22.35 U$23.14
N$343: U$22.34 U$23.15
N$344: U$22.33 U$23.16
N$345: U$22.32 U$23.17
N$346: U$22.31 U$23.18
N$347: U$22.30 U$23.19
N$348: U$22.29 U$23.20
N$349: U$22.28 U$23.21
N$350: U$22.27 U$23.22
N$351: U$22.26 U$23.23
N$352: U$22.25 U$23.24
N$353: U$23.48 U$24.1
N$354: U$23.47 U$24.2
N$355: U$23.46 U$24.3
N$356: U$23.45 U$24.4
N$357: U$23.44 U$24.5
N$358: U$23.43 U$24.6
N$359: U$23.42 U$24.7
N$360: U$23.41 U$24.8
N$361: U$23.40 U$24.9
N$362: U$23.39 U$24.10
N$363: U$23.38 U$24.11
N$364: U$23.37 U$24.12
N$365: U$23.36 U$24.13
N$366: U$23.35 U$24.14
N$367: U$23.34 U$24.15
N$368: U$23.33 U$24.16
N$369: U$23.32 U$24.17
N$370: U$23.31 U$24.18
N$371: U$23.30 U$24.19
N$372: U$23.29 U$24.20
N$373: U$23.28 U$24.21
N$374: U$23.27 U$24.22
N$375: U$23.26 U$24.23
N$376: U$23.25 U$24.24
N$377: U$25.25 U$26.24
N$378: U$25.26 U$26.23
N$379: U$25.27 U$26.22
N$380: U$25.28 U$26.21
N$381: U$25.29 U$26.20
N$382: U$25.30 U$26.19
N$383: U$25.31 U$26.18
N$384: U$25.32 U$26.17
N$385: U$25.33 U$26.16
N$386: U$25.34 U$26.15
N$387: U$25.35 U$26.14
N$388: U$25.36 U$26.13
N$389: U$25.37 U$26.12
N$390: U$25.38 U$26.11
N$391: U$25.39 U$26.10
N$392: U$25.40 U$26.9
N$393: U$25.41 U$26.8
N$394: U$25.42 U$26.7
N$395: U$25.43 U$26.6
N$396: U$25.44 U$26.5
N$397: U$25.45 U$26.4
N$398: U$25.46 U$26.3
N$399: U$25.47 U$26.2
N$400: U$25.48 U$26.1
N$401: U$26.25 U$27.24
N$402: U$26.26 U$27.23
N$403: U$26.27 U$27.22
N$404: U$26.28 U$27.21
N$405: U$26.29 U$27.20
N$406: U$26.30 U$27.19
N$407: U$26.31 U$27.18
N$408: U$26.32 U$27.17
N$409: U$26.33 U$27.16
N$410: U$26.34 U$27.15
N$411: U$26.35 U$27.14
N$412: U$26.36 U$27.13
N$413: U$26.37 U$27.12
N$414: U$26.38 U$27.11
N$415: U$26.39 U$27.10
N$416: U$26.40 U$27.9
N$417: U$26.41 U$27.8
N$418: U$26.42 U$27.7
N$419: U$26.43 U$27.6
N$420: U$26.44 U$27.5
N$421: U$26.45 U$27.4
N$422: U$26.46 U$27.3
N$423: U$26.47 U$27.2
N$424: U$26.48 U$27.1
N$425: U$27.25 U$28.24
N$426: U$27.26 U$28.23
N$427: U$27.27 U$28.22
N$428: U$27.28 U$28.21
N$429: U$27.29 U$28.20
N$430: U$27.30 U$28.19
N$431: U$27.31 U$28.18
N$432: U$27.32 U$28.17
N$433: U$27.33 U$28.16
N$434: U$27.34 U$28.15
N$435: U$27.35 U$28.14
N$436: U$27.36 U$28.13
N$437: U$27.37 U$28.12
N$438: U$27.38 U$28.11
N$439: U$27.39 U$28.10
N$440: U$27.40 U$28.9
N$441: U$27.41 U$28.8
N$442: U$27.42 U$28.7
N$443: U$27.43 U$28.6
N$444: U$27.44 U$28.5
N$445: U$27.45 U$28.4
N$446: U$27.46 U$28.3
N$447: U$27.47 U$28.2
N$448: U$27.48 U$28.1
N$449: U$28.25 U$29.24
N$450: U$28.26 U$29.23
N$451: U$28.27 U$29.22
N$452: U$28.28 U$29.21
N$453: U$28.29 U$29.20
N$454: U$28.30 U$29.19
N$455: U$28.31 U$29.18
N$456: U$28.32 U$29.17
N$457: U$28.33 U$29.16
N$458: U$28.34 U$29.15
N$459: U$28.35 U$29.14
N$460: U$28.36 U$29.13
N$461: U$28.37 U$29.12
N$462: U$28.38 U$29.11
N$463: U$28.39 U$29.10
N$464: U$28.40 U$29.9
N$465: U$28.41 U$29.8
N$466: U$28.42 U$29.7
N$467: U$28.43 U$29.6
N$468: U$28.44 U$29.5
N$469: U$28.45 U$29.4
N$470: U$28.46 U$29.3
N$471: U$28.47 U$29.2
N$472: U$28.48 U$29.1
N$473: U$29.25 U$30.24
N$474: U$29.26 U$30.23
N$475: U$29.27 U$30.22
N$476: U$29.28 U$30.21
N$477: U$29.29 U$30.20
N$478: U$29.30 U$30.19
N$479: U$29.31 U$30.18
N$480: U$29.32 U$30.17
N$481: U$29.33 U$30.16
N$482: U$29.34 U$30.15
N$483: U$29.35 U$30.14
N$484: U$29.36 U$30.13
N$485: U$29.37 U$30.12
N$486: U$29.38 U$30.11
N$487: U$29.39 U$30.10
N$488: U$29.40 U$30.9
N$489: U$29.41 U$30.8
N$490: U$29.42 U$30.7
N$491: U$29.43 U$30.6
N$492: U$29.44 U$30.5
N$493: U$29.45 U$30.4
N$494: U$29.46 U$30.3
N$495: U$29.47 U$30.2
N$496: U$29.48 U$30.1
N$497: U$40.48 U$41.1
N$498: U$40.47 U$41.2
N$499: U$40.46 U$41.3
N$500: U$40.45 U$41.4
N$501: U$40.44 U$41.5
N$502: U$40.43 U$41.6
N$503: U$40.42 U$41.7
N$504: U$40.41 U$41.8
N$505: U$40.40 U$41.9
N$506: U$40.39 U$41.10
N$507: U$40.38 U$41.11
N$508: U$40.37 U$41.12
N$509: U$40.36 U$41.13
N$510: U$40.35 U$41.14
N$511: U$40.34 U$41.15
N$512: U$40.33 U$41.16
N$513: U$40.32 U$41.17
N$514: U$40.31 U$41.18
N$515: U$40.30 U$41.19
N$516: U$40.29 U$41.20
N$517: U$40.28 U$41.21
N$518: U$40.27 U$41.22
N$519: U$40.26 U$41.23
N$520: U$40.25 U$41.24
N$521: U$41.48 U$42.1
N$522: U$41.47 U$42.2
N$523: U$41.46 U$42.3
N$524: U$41.45 U$42.4
N$525: U$41.44 U$42.5
N$526: U$41.43 U$42.6
N$527: U$41.42 U$42.7
N$528: U$41.41 U$42.8
N$529: U$41.40 U$42.9
N$530: U$41.39 U$42.10
N$531: U$41.38 U$42.11
N$532: U$41.37 U$42.12
N$533: U$41.36 U$42.13
N$534: U$41.35 U$42.14
N$535: U$41.34 U$42.15
N$536: U$41.33 U$42.16
N$537: U$41.32 U$42.17
N$538: U$41.31 U$42.18
N$539: U$41.30 U$42.19
N$540: U$41.29 U$42.20
N$541: U$41.28 U$42.21
N$542: U$41.27 U$42.22
N$543: U$41.26 U$42.23
N$544: U$41.25 U$42.24
N$545: U$42.48 U$43.1
N$546: U$42.47 U$43.2
N$547: U$42.46 U$43.3
N$548: U$42.45 U$43.4
N$549: U$42.44 U$43.5
N$550: U$42.43 U$43.6
N$551: U$42.42 U$43.7
N$552: U$42.41 U$43.8
N$553: U$42.40 U$43.9
N$554: U$42.39 U$43.10
N$555: U$42.38 U$43.11
N$556: U$42.37 U$43.12
N$557: U$42.36 U$43.13
N$558: U$42.35 U$43.14
N$559: U$42.34 U$43.15
N$560: U$42.33 U$43.16
N$561: U$42.32 U$43.17
N$562: U$42.31 U$43.18
N$563: U$42.30 U$43.19
N$564: U$42.29 U$43.20
N$565: U$42.28 U$43.21
N$566: U$42.27 U$43.22
N$567: U$42.26 U$43.23
N$568: U$42.25 U$43.24
N$569: U$43.48 U$44.1
N$570: U$43.47 U$44.2
N$571: U$43.46 U$44.3
N$572: U$43.45 U$44.4
N$573: U$43.44 U$44.5
N$574: U$43.43 U$44.6
N$575: U$43.42 U$44.7
N$576: U$43.41 U$44.8
N$577: U$43.40 U$44.9
N$578: U$43.39 U$44.10
N$579: U$43.38 U$44.11
N$580: U$43.37 U$44.12
N$581: U$43.36 U$44.13
N$582: U$43.35 U$44.14
N$583: U$43.34 U$44.15
N$584: U$43.33 U$44.16
N$585: U$43.32 U$44.17
N$586: U$43.31 U$44.18
N$587: U$43.30 U$44.19
N$588: U$43.29 U$44.20
N$589: U$43.28 U$44.21
N$590: U$43.27 U$44.22
N$591: U$43.26 U$44.23
N$592: U$43.25 U$44.24
N$593: U$44.48 U$45.1
N$594: U$44.47 U$45.2
N$595: U$44.46 U$45.3
N$596: U$44.45 U$45.4
N$597: U$44.44 U$45.5
N$598: U$44.43 U$45.6
N$599: U$44.42 U$45.7
N$600: U$44.41 U$45.8
N$601: U$44.40 U$45.9
N$602: U$44.39 U$45.10
N$603: U$44.38 U$45.11
N$604: U$44.37 U$45.12
N$605: U$44.36 U$45.13
N$606: U$44.35 U$45.14
N$607: U$44.34 U$45.15
N$608: U$44.33 U$45.16
N$609: U$44.32 U$45.17
N$610: U$44.31 U$45.18
N$611: U$44.30 U$45.19
N$612: U$44.29 U$45.20
N$613: U$44.28 U$45.21
N$614: U$44.27 U$45.22
N$615: U$44.26 U$45.23
N$616: U$44.25 U$45.24
N$617: U$46.25 U$47.24
N$618: U$46.26 U$47.23
N$619: U$46.27 U$47.22
N$620: U$46.28 U$47.21
N$621: U$46.29 U$47.20
N$622: U$46.30 U$47.19
N$623: U$46.31 U$47.18
N$624: U$46.32 U$47.17
N$625: U$46.33 U$47.16
N$626: U$46.34 U$47.15
N$627: U$46.35 U$47.14
N$628: U$46.36 U$47.13
N$629: U$46.37 U$47.12
N$630: U$46.38 U$47.11
N$631: U$46.39 U$47.10
N$632: U$46.40 U$47.9
N$633: U$46.41 U$47.8
N$634: U$46.42 U$47.7
N$635: U$46.43 U$47.6
N$636: U$46.44 U$47.5
N$637: U$46.45 U$47.4
N$638: U$46.46 U$47.3
N$639: U$46.47 U$47.2
N$640: U$46.48 U$47.1
N$641: U$47.25 U$48.24
N$642: U$47.26 U$48.23
N$643: U$47.27 U$48.22
N$644: U$47.28 U$48.21
N$645: U$47.29 U$48.20
N$646: U$47.30 U$48.19
N$647: U$47.31 U$48.18
N$648: U$47.32 U$48.17
N$649: U$47.33 U$48.16
N$650: U$47.34 U$48.15
N$651: U$47.35 U$48.14
N$652: U$47.36 U$48.13
N$653: U$47.37 U$48.12
N$654: U$47.38 U$48.11
N$655: U$47.39 U$48.10
N$656: U$47.40 U$48.9
N$657: U$47.41 U$48.8
N$658: U$47.42 U$48.7
N$659: U$47.43 U$48.6
N$660: U$47.44 U$48.5
N$661: U$47.45 U$48.4
N$662: U$47.46 U$48.3
N$663: U$47.47 U$48.2
N$664: U$47.48 U$48.1
N$665: U$48.25 U$49.24
N$666: U$48.26 U$49.23
N$667: U$48.27 U$49.22
N$668: U$48.28 U$49.21
N$669: U$48.29 U$49.20
N$670: U$48.30 U$49.19
N$671: U$48.31 U$49.18
N$672: U$48.32 U$49.17
N$673: U$48.33 U$49.16
N$674: U$48.34 U$49.15
N$675: U$48.35 U$49.14
N$676: U$48.36 U$49.13
N$677: U$48.37 U$49.12
N$678: U$48.38 U$49.11
N$679: U$48.39 U$49.10
N$680: U$48.40 U$49.9
N$681: U$48.41 U$49.8
N$682: U$48.42 U$49.7
N$683: U$48.43 U$49.6
N$684: U$48.44 U$49.5
N$685: U$48.45 U$49.4
N$686: U$48.46 U$49.3
N$687: U$48.47 U$49.2
N$688: U$48.48 U$49.1
N$689: U$49.25 U$50.24
N$690: U$49.26 U$50.23
N$691: U$49.27 U$50.22
N$692: U$49.28 U$50.21
N$693: U$49.29 U$50.20
N$694: U$49.30 U$50.19
N$695: U$49.31 U$50.18
N$696: U$49.32 U$50.17
N$697: U$49.33 U$50.16
N$698: U$49.34 U$50.15
N$699: U$49.35 U$50.14
N$700: U$49.36 U$50.13
N$701: U$49.37 U$50.12
N$702: U$49.38 U$50.11
N$703: U$49.39 U$50.10
N$704: U$49.40 U$50.9
N$705: U$49.41 U$50.8
N$706: U$49.42 U$50.7
N$707: U$49.43 U$50.6
N$708: U$49.44 U$50.5
N$709: U$49.45 U$50.4
N$710: U$49.46 U$50.3
N$711: U$49.47 U$50.2
N$712: U$49.48 U$50.1
N$713: U$50.25 U$51.24
N$714: U$50.26 U$51.23
N$715: U$50.27 U$51.22
N$716: U$50.28 U$51.21
N$717: U$50.29 U$51.20
N$718: U$50.30 U$51.19
N$719: U$50.31 U$51.18
N$720: U$50.32 U$51.17
N$721: U$50.33 U$51.16
N$722: U$50.34 U$51.15
N$723: U$50.35 U$51.14
N$724: U$50.36 U$51.13
N$725: U$50.37 U$51.12
N$726: U$50.38 U$51.11
N$727: U$50.39 U$51.10
N$728: U$50.40 U$51.9
N$729: U$50.41 U$51.8
N$730: U$50.42 U$51.7
N$731: U$50.43 U$51.6
N$732: U$50.44 U$51.5
N$733: U$50.45 U$51.4
N$734: U$50.46 U$51.3
N$735: U$50.47 U$51.2
N$736: U$50.48 U$51.1
N$737: U$52.48 U$53.1
N$738: U$52.47 U$53.2
N$739: U$52.46 U$53.3
N$740: U$52.45 U$53.4
N$741: U$52.44 U$53.5
N$742: U$52.43 U$53.6
N$743: U$52.42 U$53.7
N$744: U$52.41 U$53.8
N$745: U$52.40 U$53.9
N$746: U$52.39 U$53.10
N$747: U$52.38 U$53.11
N$748: U$52.37 U$53.12
N$749: U$52.36 U$53.13
N$750: U$52.35 U$53.14
N$751: U$52.34 U$53.15
N$752: U$52.33 U$53.16
N$753: U$52.32 U$53.17
N$754: U$52.31 U$53.18
N$755: U$52.30 U$53.19
N$756: U$52.29 U$53.20
N$757: U$52.28 U$53.21
N$758: U$52.27 U$53.22
N$759: U$52.26 U$53.23
N$760: U$52.25 U$53.24
N$761: U$53.48 U$54.1
N$762: U$53.47 U$54.2
N$763: U$53.46 U$54.3
N$764: U$53.45 U$54.4
N$765: U$53.44 U$54.5
N$766: U$53.43 U$54.6
N$767: U$53.42 U$54.7
N$768: U$53.41 U$54.8
N$769: U$53.40 U$54.9
N$770: U$53.39 U$54.10
N$771: U$53.38 U$54.11
N$772: U$53.37 U$54.12
N$773: U$53.36 U$54.13
N$774: U$53.35 U$54.14
N$775: U$53.34 U$54.15
N$776: U$53.33 U$54.16
N$777: U$53.32 U$54.17
N$778: U$53.31 U$54.18
N$779: U$53.30 U$54.19
N$780: U$53.29 U$54.20
N$781: U$53.28 U$54.21
N$782: U$53.27 U$54.22
N$783: U$53.26 U$54.23
N$784: U$53.25 U$54.24
N$785: U$54.48 U$55.1
N$786: U$54.47 U$55.2
N$787: U$54.46 U$55.3
N$788: U$54.45 U$55.4
N$789: U$54.44 U$55.5
N$790: U$54.43 U$55.6
N$791: U$54.42 U$55.7
N$792: U$54.41 U$55.8
N$793: U$54.40 U$55.9
N$794: U$54.39 U$55.10
N$795: U$54.38 U$55.11
N$796: U$54.37 U$55.12
N$797: U$54.36 U$55.13
N$798: U$54.35 U$55.14
N$799: U$54.34 U$55.15
N$800: U$54.33 U$55.16
N$801: U$54.32 U$55.17
N$802: U$54.31 U$55.18
N$803: U$54.30 U$55.19
N$804: U$54.29 U$55.20
N$805: U$54.28 U$55.21
N$806: U$54.27 U$55.22
N$807: U$54.26 U$55.23
N$808: U$54.25 U$55.24
N$809: U$55.48 U$56.1
N$810: U$55.47 U$56.2
N$811: U$55.46 U$56.3
N$812: U$55.45 U$56.4
N$813: U$55.44 U$56.5
N$814: U$55.43 U$56.6
N$815: U$55.42 U$56.7
N$816: U$55.41 U$56.8
N$817: U$55.40 U$56.9
N$818: U$55.39 U$56.10
N$819: U$55.38 U$56.11
N$820: U$55.37 U$56.12
N$821: U$55.36 U$56.13
N$822: U$55.35 U$56.14
N$823: U$55.34 U$56.15
N$824: U$55.33 U$56.16
N$825: U$55.32 U$56.17
N$826: U$55.31 U$56.18
N$827: U$55.30 U$56.19
N$828: U$55.29 U$56.20
N$829: U$55.28 U$56.21
N$830: U$55.27 U$56.22
N$831: U$55.26 U$56.23
N$832: U$55.25 U$56.24
N$833: U$56.48 U$57.1
N$834: U$56.47 U$57.2
N$835: U$56.46 U$57.3
N$836: U$56.45 U$57.4
N$837: U$56.44 U$57.5
N$838: U$56.43 U$57.6
N$839: U$56.42 U$57.7
N$840: U$56.41 U$57.8
N$841: U$56.40 U$57.9
N$842: U$56.39 U$57.10
N$843: U$56.38 U$57.11
N$844: U$56.37 U$57.12
N$845: U$56.36 U$57.13
N$846: U$56.35 U$57.14
N$847: U$56.34 U$57.15
N$848: U$56.33 U$57.16
N$849: U$56.32 U$57.17
N$850: U$56.31 U$57.18
N$851: U$56.30 U$57.19
N$852: U$56.29 U$57.20
N$853: U$56.28 U$57.21
N$854: U$56.27 U$57.22
N$855: U$56.26 U$57.23
N$856: U$56.25 U$57.24
N$857: U$58.25 U$59.24
N$858: U$58.26 U$59.23
N$859: U$58.27 U$59.22
N$860: U$58.28 U$59.21
N$861: U$58.29 U$59.20
N$862: U$58.30 U$59.19
N$863: U$58.31 U$59.18
N$864: U$58.32 U$59.17
N$865: U$58.33 U$59.16
N$866: U$58.34 U$59.15
N$867: U$58.35 U$59.14
N$868: U$58.36 U$59.13
N$869: U$58.37 U$59.12
N$870: U$58.38 U$59.11
N$871: U$58.39 U$59.10
N$872: U$58.40 U$59.9
N$873: U$58.41 U$59.8
N$874: U$58.42 U$59.7
N$875: U$58.43 U$59.6
N$876: U$58.44 U$59.5
N$877: U$58.45 U$59.4
N$878: U$58.46 U$59.3
N$879: U$58.47 U$59.2
N$880: U$58.48 U$59.1
N$881: U$59.25 U$60.24
N$882: U$59.26 U$60.23
N$883: U$59.27 U$60.22
N$884: U$59.28 U$60.21
N$885: U$59.29 U$60.20
N$886: U$59.30 U$60.19
N$887: U$59.31 U$60.18
N$888: U$59.32 U$60.17
N$889: U$59.33 U$60.16
N$890: U$59.34 U$60.15
N$891: U$59.35 U$60.14
N$892: U$59.36 U$60.13
N$893: U$59.37 U$60.12
N$894: U$59.38 U$60.11
N$895: U$59.39 U$60.10
N$896: U$59.40 U$60.9
N$897: U$59.41 U$60.8
N$898: U$59.42 U$60.7
N$899: U$59.43 U$60.6
N$900: U$59.44 U$60.5
N$901: U$59.45 U$60.4
N$902: U$59.46 U$60.3
N$903: U$59.47 U$60.2
N$904: U$59.48 U$60.1
N$905: U$60.25 U$61.24
N$906: U$60.26 U$61.23
N$907: U$60.27 U$61.22
N$908: U$60.28 U$61.21
N$909: U$60.29 U$61.20
N$910: U$60.30 U$61.19
N$911: U$60.31 U$61.18
N$912: U$60.32 U$61.17
N$913: U$60.33 U$61.16
N$914: U$60.34 U$61.15
N$915: U$60.35 U$61.14
N$916: U$60.36 U$61.13
N$917: U$60.37 U$61.12
N$918: U$60.38 U$61.11
N$919: U$60.39 U$61.10
N$920: U$60.40 U$61.9
N$921: U$60.41 U$61.8
N$922: U$60.42 U$61.7
N$923: U$60.43 U$61.6
N$924: U$60.44 U$61.5
N$925: U$60.45 U$61.4
N$926: U$60.46 U$61.3
N$927: U$60.47 U$61.2
N$928: U$60.48 U$61.1
N$929: U$61.25 U$62.24
N$930: U$61.26 U$62.23
N$931: U$61.27 U$62.22
N$932: U$61.28 U$62.21
N$933: U$61.29 U$62.20
N$934: U$61.30 U$62.19
N$935: U$61.31 U$62.18
N$936: U$61.32 U$62.17
N$937: U$61.33 U$62.16
N$938: U$61.34 U$62.15
N$939: U$61.35 U$62.14
N$940: U$61.36 U$62.13
N$941: U$61.37 U$62.12
N$942: U$61.38 U$62.11
N$943: U$61.39 U$62.10
N$944: U$61.40 U$62.9
N$945: U$61.41 U$62.8
N$946: U$61.42 U$62.7
N$947: U$61.43 U$62.6
N$948: U$61.44 U$62.5
N$949: U$61.45 U$62.4
N$950: U$61.46 U$62.3
N$951: U$61.47 U$62.2
N$952: U$61.48 U$62.1
N$953: U$62.25 U$63.24
N$954: U$62.26 U$63.23
N$955: U$62.27 U$63.22
N$956: U$62.28 U$63.21
N$957: U$62.29 U$63.20
N$958: U$62.30 U$63.19
N$959: U$62.31 U$63.18
N$960: U$62.32 U$63.17
N$961: U$62.33 U$63.16
N$962: U$62.34 U$63.15
N$963: U$62.35 U$63.14
N$964: U$62.36 U$63.13
N$965: U$62.37 U$63.12
N$966: U$62.38 U$63.11
N$967: U$62.39 U$63.10
N$968: U$62.40 U$63.9
N$969: U$62.41 U$63.8
N$970: U$62.42 U$63.7
N$971: U$62.43 U$63.6
N$972: U$62.44 U$63.5
N$973: U$62.45 U$63.4
N$974: U$62.46 U$63.3
N$975: U$62.47 U$63.2
N$976: U$62.48 U$63.1
N$977: R42.1 U$9.A0 U$10.WDI
N$979: BMS-OK1.A IC4.6 IC4.7
N$980: BMS-OK1.C R1.1
N$981: ON-LED1.C R2.1
N$982: U$73.1 U$75.D3(CANTX)
N$983: R8.2 U$73.8
N$984: C5.2 R6.1
N$985: C6.2 R7.1
N$986: R9.1 TEENSY1.C
N$987: R10.1 U$74.16
N$988: R10.2 R11.1 U$74.15
N$989: C7.1 U$77.P$11
N$990: U$73.4 U$75.D4(CANRX)
N$991: TEENSY1.A U$75.D7(RX3)
N$993: R15.2 U$76.WDO U$78.2
N$994: U$75.A1 U$78.1
N$995: R17.1 U$75.A0 U$76.WDI
N$997: BMS-OK2.A IC6.6 IC6.7
N$998: BMS-OK2.C R18.1
N$999: ON-LED2.C R19.1
N$1000: U$79.1 U$81.D3(CANTX)
N$1001: R23.2 U$79.8
N$1002: C14.2 R21.1
N$1003: C17.2 R22.1
N$1004: R24.1 TEENSY2.C
N$1005: R25.1 U$80.16
N$1006: R25.2 R26.1 U$80.15
N$1007: C18.1 U$83.P$11
N$1009: U$79.4 U$81.D4(CANRX)
N$1010: TEENSY2.A U$81.D7(RX3)
N$1011: R43.2 U$82.WDO U$84.2
N$1012: U$81.A1 U$84.1
N$1013: R45.1 U$81.A0 U$82.WDI
SCK_TEENSY: U$8.4 U$9.D13
SCK_TEENSY1: U$74.4 U$75.D13
SCK_TEENSY2: U$80.4 U$81.D13

## Tracks (layer width: path | path; a pad name or v marks a point on that pad's centre or on a via)
+3V1  (via drill 0.35)
  Top 0.254: C11.2 16.75,61.09 v18.03,61.09
  Top 0.305: U$75.3.3V 7.75,66.8 7.75,64.14 10.79,61.09 v18.03,61.09 23.32,61.09 v23.37,61.04
  Bottom 0.305: U$74.6 18.3,60.82 v18.03,61.09 | U$78.5 29.14,61.04 v23.37,61.04
+3V2  (via drill 0.35)
  Top 0.254: C20.2 16.75,110.62 v18.03,110.62
  Top 0.305: U$81.3.3V 7.75,116.33 7.75,113.67 10.79,110.62 v18.03,110.62 23.32,110.62 v23.37,110.57
  Bottom 0.305: U$80.6 18.3,110.35 v18.03,110.62 | U$84.5 29.14,110.57 v23.37,110.57
+3V3  (via drill 0.35)
  Top 0.254: C15.2 16.75,11.81 v18.03,11.81
  Top 0.305: U$9.3.3V 7.75,17.53 7.75,14.86 10.79,11.81 v18.03,11.81 23.32,11.81 v23.37,11.76
  Bottom 0.305: U$8.6 18.3,11.54 v18.03,11.81 | U$3.5 29.14,11.76 v23.37,11.76
+5V  (via drill 0.35)
  Top 0.254: C16.2 12.7,10.54
  Top 0.61: v3.3,27.18 4.8,28.68 IC1.3 | U$9.VIN 2.79,13.72 v7.87,8.64 9.78,10.54 12.7,10.54 v16.13,10.54 | v25.02,20.32 25.02,21.75 ON-LED.A | R38.1 33.27,21.07 v33.27,20.32 | v32,15.88 34.54,13.34 v34.54,12.02
  Bottom 0.305: v16.13,10.54 16.76,9.91 U$8.8 17.4,9.91 | U$8.7 17.4,9.91 | U$8.9 17.3,12.7 | 17.3,12.7 17.3,10.01 17.4,9.91 | U$8.12 18.8,13.21 | 17.3,12.7 18.29,12.7 18.8,13.21 | 18.8,13.21 20.8,11.21 U$8.1 22.54,9.91 IC2.8 23.24,7.49 24.26,6.48 33.01,6.48 R36.1 | R37.1 33.38,8.91 33.38,10.41 U$10.VCC 34.54,11.58 v34.54,12.02
  Bottom 0.61: C3.1 6.83,28.92 6.83,28.93 IC1.3 | U$9.VIN 2.66,17.79 2.66,26.53 v3.3,27.18 | v7.87,8.64 7.87,6.48 8.89,5.46 10.16,5.46 10.67,5.97 U$7.3 | R37.1 R36.1 | v25.02,20.32 25.65,19.68 31.37,19.68 32,19.05 | 32,19.05 v32,15.88 | v33.27,20.32 32,19.05
+5V1  (via drill 0.35)
  Top 0.254: C12.2 12.7,59.82
  Top 0.61: v3.3,76.45 4.8,77.95 IC3.3 | U$75.VIN 2.79,62.99 v7.87,57.91 9.78,59.82 12.7,59.82 v16.13,59.82 | v25.02,69.6 25.02,71.03 ON-LED1.A | R15.1 33.27,70.34 v33.27,69.6 | v32,65.15 34.54,62.61 v34.54,61.29
  Bottom 0.305: v16.13,59.82 16.76,59.19 U$74.8 17.4,59.19 | U$74.7 17.4,59.19 | U$74.9 17.3,61.98 | 17.3,61.98 17.3,59.29 17.4,59.19 | U$74.12 18.8,62.49 | 17.3,61.98 18.29,61.98 18.8,62.49 | 18.8,62.49 20.8,60.49 U$74.1 22.54,59.19 IC4.8 23.24,56.77 24.26,55.75 33.01,55.75 R13.1 | R14.1 33.38,58.18 33.38,59.69 U$76.VCC 34.54,60.86 v34.54,61.29
  Bottom 0.61: C1.1 6.83,78.2 6.83,78.21 IC3.3 | U$75.VIN 2.66,67.06 2.66,75.81 v3.3,76.45 | v7.87,57.91 7.87,55.75 8.89,54.74 10.16,54.74 10.67,55.24 U$73.3 | R14.1 R13.1 | v25.02,69.6 25.65,68.96 31.37,68.96 32,68.33 | 32,68.33 v32,65.15 | v33.27,69.6 32,68.33
+5V2  (via drill 0.35)
  Top 0.254: C21.2 12.7,109.35
  Top 0.61: v3.3,125.98 4.8,127.48 IC5.3 | U$81.VIN 2.79,112.52 v7.87,107.44 9.78,109.35 12.7,109.35 v16.13,109.35 | v25.02,119.13 25.02,120.56 ON-LED2.A | R43.1 33.27,119.87 v33.27,119.13 | v32,114.68 34.54,112.14 v34.54,110.82
  Bottom 0.305: v16.13,109.35 16.76,108.72 U$80.8 17.4,108.72 | U$80.7 17.4,108.72 | U$80.9 17.3,111.51 | 17.3,111.51 17.3,108.82 17.4,108.72 | U$80.12 18.8,112.02 | 17.3,111.51 18.29,111.51 18.8,112.02 | 18.8,112.02 20.8,110.02 U$80.1 22.54,108.72 IC6.8 23.24,106.3 24.26,105.28 33.01,105.28 R39.1 | R41.1 33.38,107.71 33.38,109.22 U$82.VCC 34.54,110.39 v34.54,110.82
  Bottom 0.61: C13.1 6.83,127.73 6.83,127.74 IC5.3 | U$81.VIN 2.66,116.59 2.66,125.34 v3.3,125.98 | v7.87,107.44 7.87,105.28 8.89,104.27 10.16,104.27 10.67,104.78 U$79.3 | R41.1 R39.1 | v25.02,119.13 25.65,118.49 31.37,118.49 32,117.86 | 32,117.86 v32,114.68 | v33.27,119.13 32,117.86
+12V
  Bottom 0.61: C2.1 5.17,35.67 IC1.1 3.02,34.27 3.02,29.46 5.97,26.52 POWER.P$1
+12V1
  Bottom 0.61: C10.1 5.17,84.95 IC3.1 3.02,83.54 3.02,78.74 5.97,75.79 POWER1.P$1
+12V2
  Bottom 0.61: C19.1 5.17,134.48 IC5.1 3.02,133.07 3.02,128.27 5.97,125.32 POWER2.P$1
BMS_OK
  Bottom 0.305: U$3.4 31.81,9.46 31.11,8.76 27.5,8.76 IC2.5
BMS_OK1
  Bottom 0.305: U$78.4 31.81,58.73 31.11,58.04 27.5,58.04 IC4.5
BMS_OK2
  Bottom 0.305: U$84.4 31.81,108.27 31.11,107.57 27.5,107.57 IC6.5
CANH
  Bottom 0.406: R28.2 7.76,10.54 11.3,10.54 11.94,11.18 U$7.7 | R27.2 6.6,15.87 6.6,19.81 8.47,21.68 POWER.P$4
  Bottom 0.61: R28.2 6.1,14.87 R27.2
CANH1
  Bottom 0.406: R6.2 7.76,59.82 11.3,59.82 11.94,60.45 U$73.7 | R3.2 6.6,65.14 6.6,69.09 8.47,70.95 POWER1.P$4
  Bottom 0.61: R6.2 6.1,64.14 R3.2
CANH2
  Bottom 0.406: R21.2 7.76,109.35 11.3,109.35 11.94,109.98 U$79.7 | R20.2 6.6,114.67 6.6,118.62 8.47,120.48 POWER2.P$4
  Bottom 0.61: R21.2 6.1,113.67 R20.2
CANL  (via drill 0.35)
  Top 0.406: v10.67,14.61 11.56,15.49 11.56,19.94 | POWER.P$3 11.56,21.4 11.56,19.94 | v4.32,19.43 4.83,19.94 11.56,19.94
  Bottom 0.406: U$7.6 v10.67,14.61 | R27.1 3.94,15.25 3.94,19.05 v4.32,19.43
  Bottom 0.61: R29.2 3.56,14.87 R27.1
CANL1  (via drill 0.35)
  Top 0.406: v10.67,63.88 11.56,64.77 11.56,69.22 | POWER1.P$3 11.56,70.68 11.56,69.22 | v4.32,68.71 4.83,69.22 11.56,69.22
  Bottom 0.406: U$73.6 v10.67,63.88 | R3.1 3.94,64.53 3.94,68.33 v4.32,68.71
  Bottom 0.61: R7.2 3.56,64.14 R3.1
CANL2  (via drill 0.35)
  Top 0.406: v10.67,113.41 11.56,114.3 11.56,118.75 | POWER2.P$3 11.56,120.21 11.56,118.75 | v4.32,118.24 4.83,118.75 11.56,118.75
  Bottom 0.406: U$79.6 v10.67,113.41 | R20.1 3.94,114.06 3.94,117.86 v4.32,118.24
  Bottom 0.61: R22.2 3.56,113.67 R20.1
CS_LTC1
  Bottom 0.305: U$75.D10(TX2) 30.73,52.32 29.67,53.39 21.91,53.39 18.8,56.5 U$74.5
CS_LTC2
  Bottom 0.305: U$81.D10(TX2) 30.73,101.85 29.67,102.92 21.91,102.92 18.8,106.03 U$80.5
CS_LTC6820
  Bottom 0.305: U$9.D10(TX2) 30.73,3.05 29.67,4.12 21.91,4.12 18.8,7.23 U$8.5
GND  (via drill 0.35)
  Top 0.254: C16.1 13.21,12.84 C15.1 17.99,15.12 18.26,15.39
  Top 0.305: v18.35,6.29 18.61,6.29 21.34,9.02 26.29,9.02 27.05,9.78 v27.05,12.45 | R4.2 16.75,16.9 18.26,15.39 v19.33,15.39
  Top 0.61: IC1.2 2.29,30.99 2.29,22.48 | v11.43,4.95 v15.49,4.95 | 2.29,22.48 3.94,20.83 4.81,20.83 POWER.P$2 | R4.2 R5.2 16.75,25.53 | 16.75,25.53 16.75,25.9 v18.1,27.24 | R31.2 24.7,25.53 | 24.7,25.53 16.75,25.53 | 24.7,25.53 29.59,25.53 31.49,23.63 R42.2 | 2.29,22.48 1.32,21.51 1.32,3.56 2.46,2.41 U$9.GND
  Bottom 0.305: U$10.EN U$10.GND 34.98,13.26 34.42,12.7 32.8,12.7 U$3.3 31.81,13.14 31.11,12.45 29.21,12.45 27.25,14.41 IC2.4 v27.05,12.45 20.94,12.45 19.84,13.54 19.84,14.07 U$8.14 U$8.13 19.33,14.14 v19.33,15.39 | v18.35,6.29 16.43,6.29 R30.1
  Bottom 0.61: C4.2 15.24,29.59 15.75,29.59 v18.1,27.24 21.08,24.26 21.08,23.5 R34.2 | IC1.2 4.92,33.62 C2.2 C3.2 | U$9.GND 2.79,4.69 C9.1 C8.1 7.1,4.45 10.92,4.45 v11.43,4.95 11.94,5.46 U$7.2 | v15.49,4.95 16.13,5.59 R30.1
GND1  (via drill 0.35)
  Top 0.254: C12.1 13.21,62.11 C11.1 17.99,64.4 18.26,64.67
  Top 0.305: v18.35,55.57 v18.35,55.56 18.61,55.56 21.34,58.29 26.29,58.29 27.05,59.05 v27.05,61.72 | R1.2 16.75,66.18 18.26,64.67 v19.33,64.67
  Top 0.61: IC3.2 2.29,80.26 2.29,71.75 | v11.43,54.23 v15.49,54.23 | 2.29,71.75 3.94,70.1 4.81,70.1 POWER1.P$2 | R1.2 R2.2 16.75,74.8 | 16.75,74.8 16.75,75.17 v18.1,76.52 | R9.2 24.7,74.8 | 24.7,74.8 16.75,74.8 | 24.7,74.8 29.59,74.8 31.49,72.91 R17.2 | 2.29,71.75 1.32,70.79 1.32,52.83 2.46,51.69 U$75.GND
  Bottom 0.305: U$76.EN U$76.GND 34.98,62.53 34.42,61.98 32.8,61.98 U$78.3 31.81,62.42 31.11,61.72 29.21,61.72 27.25,63.69 IC4.4 v27.05,61.72 20.94,61.72 19.84,62.82 19.84,63.35 U$74.14 U$74.13 19.33,63.42 v19.33,64.67 | v18.35,55.57 16.43,55.57 R8.1
  Bottom 0.61: C7.2 15.24,78.87 15.75,78.87 v18.1,76.52 21.08,73.53 21.08,72.78 R11.2 | IC3.2 4.92,82.9 C10.2 C1.2 | U$75.GND 2.79,53.97 C6.1 C5.1 7.1,53.72 10.92,53.72 v11.43,54.23 11.94,54.74 U$73.2 | v15.49,54.23 16.13,54.86 R8.1
GND2  (via drill 0.35)
  Top 0.254: C21.1 13.21,111.64 C20.1 17.99,113.93 18.26,114.2
  Top 0.305: v18.35,105.1 v18.35,105.09 18.61,105.09 21.34,107.82 26.29,107.82 27.05,108.58 v27.05,111.25 | R18.2 16.75,115.71 18.26,114.2 v19.33,114.2
  Top 0.61: IC5.2 2.29,129.79 2.29,121.28 | v11.43,103.76 v15.49,103.76 | 2.29,121.28 3.94,119.63 4.81,119.63 POWER2.P$2 | R18.2 R19.2 16.75,124.33 | 16.75,124.33 16.75,124.7 v18.1,126.05 | R24.2 24.7,124.33 | 24.7,124.33 16.75,124.33 | 24.7,124.33 29.59,124.33 31.49,122.44 R45.2 | 2.29,121.28 1.32,120.32 1.32,102.36 2.46,101.22 U$81.GND
  Bottom 0.305: U$82.EN U$82.GND 34.98,112.06 34.42,111.51 32.8,111.51 U$84.3 31.81,111.95 31.11,111.25 29.21,111.25 27.25,113.22 IC6.4 v27.05,111.25 20.94,111.25 19.84,112.35 19.84,112.88 U$80.14 U$80.13 19.33,112.95 v19.33,114.2 | v18.35,105.1 16.43,105.1 R23.1
  Bottom 0.61: C18.2 15.24,128.4 15.75,128.4 v18.1,126.05 21.08,123.06 21.08,122.31 R26.2 | IC5.2 4.92,132.43 C19.2 C13.2 | U$81.GND 2.79,103.5 C17.1 C14.1 7.1,103.25 10.92,103.25 v11.43,103.76 11.94,104.27 U$79.2 | v15.49,103.76 16.13,104.39 R23.1
IM  (via drill 0.38)
  Top 0.254: v10.92,33.78 10.92,38.48 11.53,39.09 U$2.P$10
  Bottom 0.254: v10.92,33.78 10.92,33.15 11.18,32.89 11.18,28.08 R35.1 11.55,27.43 11.55,24.38
  Bottom 0.305: 11.55,24.38 14.35,21.58 14.35,16.13 14.99,15.49 17.02,15.49 17.8,14.71 U$8.10
IM1  (via drill 0.38)
  Top 0.254: v10.92,83.06 10.92,87.76 11.53,88.36 U$77.P$10
  Bottom 0.254: v10.92,83.06 10.92,82.42 11.18,82.17 11.18,77.35 R12.1 11.55,76.71 11.55,73.66
  Bottom 0.305: 11.55,73.66 14.35,70.86 14.35,65.41 14.99,64.77 17.02,64.77 17.8,63.99 U$74.10
IM2  (via drill 0.38)
  Top 0.254: v10.92,132.59 10.92,137.29 11.53,137.89 U$83.P$10
  Bottom 0.254: v10.92,132.59 10.92,131.95 11.18,131.7 11.18,126.88 R32.1 11.55,126.24 11.55,123.19
  Bottom 0.305: 11.55,123.19 14.35,120.39 14.35,114.94 14.99,114.3 17.02,114.3 17.8,113.52 U$80.10
IP  (via drill 0.35)
  Top 0.254: U$2.P$12 12.42,34.83 v12.42,32.89
  Bottom 0.254: R35.2 13.18,27.94 13.18,32.13 v12.42,32.89
  Bottom 0.305: R35.2 13.09,24.88 16.7,21.27 16.7,16.73 18.3,15.13 U$8.11
IP1  (via drill 0.35)
  Top 0.254: U$77.P$12 12.42,84.11 v12.42,82.17
  Bottom 0.254: R12.2 13.18,77.22 13.18,81.41 v12.42,82.17
  Bottom 0.305: R12.2 13.09,74.16 16.7,70.55 16.7,66 18.3,64.4 U$74.11
IP2  (via drill 0.35)
  Top 0.254: U$83.P$12 12.42,133.64 v12.42,131.7
  Bottom 0.254: R32.2 13.18,126.75 13.18,130.94 v12.42,131.7
  Bottom 0.305: R32.2 13.09,123.69 16.7,120.08 16.7,115.53 18.3,113.93 U$80.11
ISOSPI-M
  Top 0.254: ISO_SPI.P$2 R40.2 27.01,39 U$2.P$3
ISOSPI-M1
  Top 0.254: ISO_SPI1.P$2 R16.2 27.01,88.27 U$77.P$3
ISOSPI-M2
  Top 0.254: ISO_SPI2.P$2 R44.2 27.01,137.8 U$83.P$3
ISOSPI-P
  Top 0.254: ISO_SPI.P$1 33.27,42.38 33.27,38.34 31.88,36.95 R40.1 28.87,35.09 U$2.P$1
ISOSPI-P1
  Top 0.254: ISO_SPI1.P$1 33.27,91.65 33.27,87.62 31.88,86.22 R16.1 28.87,84.36 U$77.P$1
ISOSPI-P2
  Top 0.254: ISO_SPI2.P$1 33.27,141.18 33.27,137.15 31.88,135.75 R44.1 28.87,133.89 U$83.P$1
MISO  (via drill 0.35)
  Top 0.305: v21.21,7.24 35.81,7.24 v36.07,7.49
  Bottom 0.305: R37.2 36.33,8.01 | 36.33,8.01 36.83,7.5 36.83,3.43 U$9.D12 | U$8.3 19.8,8.65 v21.21,7.24 | v36.07,7.49 36.33,7.75 36.33,8.01
MISO1  (via drill 0.35)
  Top 0.305: v21.21,56.52 35.81,56.52 v36.07,56.77
  Bottom 0.305: R14.2 36.33,57.28 | 36.33,57.28 36.83,56.78 36.83,52.7 U$75.D12 | U$74.3 19.8,57.92 v21.21,56.52 | v36.07,56.77 36.33,57.03 36.33,57.28
MISO2  (via drill 0.35)
  Top 0.305: v21.21,106.05 35.81,106.05 v36.07,106.3
  Bottom 0.305: R41.2 36.33,106.81 | 36.33,106.81 36.83,106.31 36.83,102.23 U$81.D12 | U$80.3 19.8,107.45 v21.21,106.05 | v36.07,106.3 36.33,106.56 36.33,106.81
MOSI_TEENSY
  Bottom 0.305: U$8.2 20.3,9.16 24.64,4.83 33.28,4.83 | R36.2 35.44,4.83 33.28,4.83 | 33.28,4.83 33.28,2.42 U$9.D11
MOSI_TEENSY1
  Bottom 0.305: U$74.2 20.3,58.44 24.64,54.1 33.28,54.1 | R13.2 35.44,54.1 33.28,54.1 | 33.28,54.1 33.28,51.7 U$75.D11
MOSI_TEENSY2
  Bottom 0.305: U$80.2 20.3,107.97 24.64,103.63 33.28,103.63 | R39.2 35.44,103.63 33.28,103.63 | 33.28,103.63 33.28,101.23 U$81.D11
N$1
  Top 0.254: U$1.48 45.57,12.45 45.36,12.65 45.36,17.53 45.57,17.73 U$4.1
N$2
  Top 0.254: U$1.47 45.97,12.65 45.97,17.53 U$4.2
N$3
  Top 0.61: R5.1 ON-LED.C
N$5
  Top 0.254: U$1.45 46.99,12.65 46.99,17.53 U$4.4
N$7
  Top 0.254: U$1.43 48.01,12.65 48.01,17.53 U$4.6
N$8
  Top 0.254: U$1.42 48.62,12.45 48.62,11.84 48.21,11.43 45.36,11.43 44.96,11.84 44.96,18.34 45.36,18.75 48.21,18.75 48.62,18.34 48.62,17.73 U$4.7
N$9
  Top 0.254: U$1.41 49.02,12.65 49.02,17.53 U$4.8
N$10
  Top 0.254: U$1.40 49.63,12.45 49.63,11.84 48.82,11.02 45.16,11.02 44.55,11.63 44.55,18.54 45.16,19.15 48.82,19.15 49.63,18.34 49.63,17.73 U$4.9
N$11
  Top 0.254: U$1.39 50.04,12.65 50.04,17.53 U$4.10
N$12
  Top 0.254: U$1.38 50.65,12.45 50.65,11.84 48.82,10.01 45.16,10.01 44.15,11.02 44.15,19.15 45.16,20.17 48.82,20.17 50.65,18.34 50.65,17.73 U$4.11
N$13
  Top 0.254: U$1.37 51.05,12.65 51.05,17.53 U$4.12
N$15
  Top 0.254: U$1.35 52.07,12.45 52.07,11.84 54.1,9.8 57.96,9.8 59.38,11.23 59.38,19.15 58.17,20.37 53.9,20.37 52.07,18.54 52.07,17.73 U$4.14
N$16
  Top 0.254: U$1.34 52.48,12.65 52.48,17.53 U$4.15
N$17
  Top 0.254: U$1.33 53.09,12.45 53.09,11.84 54.71,10.21 57.76,10.21 58.98,11.43 58.98,18.95 57.96,19.96 54.51,19.96 53.09,18.54 53.09,17.73 U$4.16
N$18
  Top 0.254: U$1.32 53.49,12.65 53.49,17.53 U$4.17
N$19
  Top 0.254: U$1.31 54.1,12.45 54.1,11.63 55.12,10.62 57.56,10.62 58.57,11.63 58.57,18.75 57.76,19.56 55.12,19.56 54.1,18.54 54.1,17.73 U$4.18
N$20
  Top 0.254: U$1.30 54.51,12.65 54.51,17.53 U$4.19
N$21